# EAGLE board board (EAGLE 9.5.2)

Size 90 x 122 mm. Coordinates in mm from the lower left corner, seen from the top.
Outline: 0,0 90,0 90,122 0,122 0,0
Copper layers (1*16): Top 0.035mm / dielectric 1.5mm / Bottom 0.035mm
Design rules "default": minimum track width 6mil, minimum drill 0.35mm, track to track 6mil, track to pad 6mil, pad to pad 6mil, via to via 6mil, smd to smd 6mil, copper to edge 40mil, drill to drill 6mil, minimum pad ring 10mil, minimum via ring 8mil, stop-mask expansion 4mil, vias tented up to drill 0mil, thermal gap 10mil

## Footprints (pad centres in the part's own frame; a part is rotated, then mirrored left to right if it is on the bottom)
DIP1524W58P254L4191H406Q32N = drill 0.784 pad 1.184 square: 1 -7.62,19.05 | drill 0.784 pad 1.184: 2 -7.62,16.51; 3 -7.62,13.97; 4 -7.62,11.43; 5 -7.62,8.89; 6 -7.62,6.35; 7 -7.62,3.81; 8 -7.62,1.27; 9 -7.62,-1.27; 10 -7.62,-3.81; 11 -7.62,-6.35; 12 -7.62,-8.89; 13 -7.62,-11.43; 14 -7.62,-13.97; 15 -7.62,-16.51; 16 -7.62,-19.05; 17 7.62,-19.05; 18 7.62,-16.51; 19 7.62,-13.97; 20 7.62,-11.43; 21 7.62,-8.89; 22 7.62,-6.35; 23 7.62,-3.81; 24 7.62,-1.27; 25 7.62,1.27; 26 7.62,3.81; 27 7.62,6.35; 28 7.62,8.89; 29 7.62,11.43; 30 7.62,13.97; 31 7.62,16.51; 32 7.62,19.05
DIL20 = drill 0.813 long: 1 -11.43,-3.81; 2 -8.89,-3.81; 3 -6.35,-3.81; 4 -3.81,-3.81; 5 -1.27,-3.81; 6 1.27,-3.81; 7 3.81,-3.81; 8 6.35,-3.81; 9 8.89,-3.81; 10 11.43,-3.81; 11 11.43,3.81; 12 8.89,3.81; 13 6.35,3.81; 14 3.81,3.81; 15 1.27,3.81; 16 -1.27,3.81; 17 -3.81,3.81; 18 -6.35,3.81; 19 -8.89,3.81; 20 -11.43,3.81
DIP1556W56P254L3702H483Q28N = drill 0.759 pad 1.159 square: 1 -7.779,16.51 | drill 0.759 pad 1.159: 2 -7.779,13.97; 3 -7.779,11.43; 4 -7.779,8.89; 5 -7.779,6.35; 6 -7.779,3.81; 7 -7.779,1.27; 8 -7.779,-1.27; 9 -7.779,-3.81; 10 -7.779,-6.35; 11 -7.779,-8.89; 12 -7.779,-11.43; 13 -7.779,-13.97; 14 -7.779,-16.51; 15 7.779,-16.51; 16 7.779,-13.97; 17 7.779,-11.43; 18 7.779,-8.89; 19 7.779,-6.35; 20 7.779,-3.81; 21 7.779,-1.27; 22 7.779,1.27; 23 7.779,3.81; 24 7.779,6.35; 25 7.779,8.89; 26 7.779,11.43; 27 7.779,13.97; 28 7.779,16.51
SOIC127P1030X265-20N = smd 1.95 x 0.65: 1 -4.725,5.715; 2 -4.725,4.445; 3 -4.725,3.175; 4 -4.725,1.905; 5 -4.725,0.635; 6 -4.725,-0.635; 7 -4.725,-1.905; 8 -4.725,-3.175; 9 -4.725,-4.445; 10 -4.725,-5.715; 11 4.725,-5.715; 12 4.725,-4.445; 13 4.725,-3.175; 14 4.725,-1.905; 15 4.725,-0.635; 16 4.725,0.635; 17 4.725,1.905; 18 4.725,3.175; 19 4.725,4.445; 20 4.725,5.715
DIL14 = drill 0.813 long: 1 -7.62,-3.81; 2 -5.08,-3.81; 3 -2.54,-3.81; 4 0,-3.81; 5 2.54,-3.81; 6 5.08,-3.81; 7 7.62,-3.81; 8 7.62,3.81; 9 5.08,3.81; 10 2.54,3.81; 11 0,3.81; 12 -2.54,3.81; 13 -5.08,3.81; 14 -7.62,3.81
DIL16 = drill 0.813 long: 1 -8.89,-3.81; 2 -6.35,-3.81; 3 -3.81,-3.81; 4 -1.27,-3.81; 5 1.27,-3.81; 6 3.81,-3.81; 7 6.35,-3.81; 8 8.89,-3.81; 9 8.89,3.81; 10 6.35,3.81; 11 3.81,3.81; 12 1.27,3.81; 13 -1.27,3.81; 14 -3.81,3.81; 15 -6.35,3.81; 16 -8.89,3.81
PAK100/2500-5-50 = drill 1 pad 1.422: 1 -30.48,-1.27; 2 -30.48,1.27; 3 -27.94,-1.27; 4 -27.94,1.27; 5 -25.4,-1.27; 6 -25.4,1.27; 7 -22.86,-1.27; 8 -22.86,1.27; 9 -20.32,-1.27; 10 -20.32,1.27; 11 -17.78,-1.27; 12 -17.78,1.27; 13 -15.24,-1.27; 14 -15.24,1.27; 15 -12.7,-1.27; 16 -12.7,1.27; 17 -10.16,-1.27; 18 -10.16,1.27; 19 -7.62,-1.27; 20 -7.62,1.27; 21 -5.08,-1.27; 22 -5.08,1.27; 23 -2.54,-1.27; 24 -2.54,1.27; 25 0,-1.27; 26 0,1.27; 27 2.54,-1.27; 28 2.54,1.27; 29 5.08,-1.27; 30 5.08,1.27; 31 7.62,-1.27; 32 7.62,1.27; 33 10.16,-1.27; 34 10.16,1.27; 35 12.7,-1.27; 36 12.7,1.27; 37 15.24,-1.27; 38 15.24,1.27; 39 17.78,-1.27; 40 17.78,1.27; 41 20.32,-1.27; 42 20.32,1.27; 43 22.86,-1.27; 44 22.86,1.27; 45 25.4,-1.27; 46 25.4,1.27; 47 27.94,-1.27; 48 27.94,1.27; 49 30.48,-1.27; 50 30.48,1.27

## Placement (x,y rotation side)
IC1  AS6C4008-55PCN  [DIP1524W58P254L4191H406Q32N]  27.59,58.59 270 top
IC2  AS6C4008-55PCN  [DIP1524W58P254L4191H406Q32N]  27.59,38.37 270 top
IC3  74S299N  [DIL20]  70.67,9.02 180 top
IC4  74S299N  [DIL20]  70.61,21.02 180 top
IC5  AT28C64B-15PU  [DIP1556W56P254L3702H483Q28N]  28.05,100.15 270 top
IC6  AT28C64B-15PU  [DIP1556W56P254L3702H483Q28N]  28.05,79.68 270 top
IC7  74S299N  [DIL20]  18,21 180 top
IC8  SN74CBT3345DW  [SOIC127P1030X265-20N]  61,35 270 bottom
IC9  SN74CBT3345DW  [SOIC127P1030X265-20N]  61,35 90 top
IC10  SN74CBT3345DW  [SOIC127P1030X265-20N]  61,52 270 bottom
IC11  SN74CBT3345DW  [SOIC127P1030X265-20N]  61,52 90 top
IC12  SN74CBT3345DW  [SOIC127P1030X265-20N]  61,69 270 bottom
IC13  SN74CBT3345DW  [SOIC127P1030X265-20N]  61,69 90 top
IC14  SN74CBT3345DW  [SOIC127P1030X265-20N]  61,86 270 bottom
IC15  SN74CBT3345DW  [SOIC127P1030X265-20N]  61,86 90 top
IC16  SN74CBT3345DW  [SOIC127P1030X265-20N]  61,103 270 bottom
IC17  SN74CBT3345DW  [SOIC127P1030X265-20N]  61,103 90 top
IC18  74S299N  [DIL20]  18,9 180 top
IC19  7404N  [DIL14]  44,9 180 top
IC20  74S08N  [DIL14]  44,21 180 top
IC23  SN74CBT3345DW  [SOIC127P1030X265-20N]  78.72,103.37 90 top
V1  74238N  [DIL16]  80.41,77.07 270 top
V2  74238N  [DIL16]  80.41,43.93 270 top
X1  2550-5  [PAK100/2500-5-50]  45,116 0 top

## Library data of the parts
IC1 IC2 = SamacSys_Parts; DESCRIPTION: CMOS SRAM; HEIGHT: 4.064mm; MANUFACTURER_NAME: Alliance Memory; MANUFACTURER_PART_NUMBER: AS6C4008-55PCN; RS_PART_NUMBER: 7444561P; RS_PRICE-STOCK: http://uk.rs-online.com/web/p/products/7444561P
IC3 IC4 IC7 IC18-IC20 = 74xx-eu
IC5 IC6 = SamacSys_Parts; DESCRIPTION: AT28C64B-15PU, Parallel EEPROM Memory 64kbit, Parallel, 150ns 4.5 5.5 V, 28-Pin PDIP; HEIGHT: 4.826mm; MANUFACTURER_NAME: Microchip; MANUFACTURER_PART_NUMBER: AT28C64B-15PU; MOUSER_PART_NUMBER: 556-AT28C64B15PU; MOUSER_PRICE-STOCK: https://www.mouser.com/Search/Refine.aspx?Keyword=556-AT28C64B15PU
IC8-IC17 IC23 = SamacSys_Parts; DESCRIPTION: Texas Instruments SN74CBT3345DW, Bus Switch, 8 x 1:1, 4.5 5.5 V, 20-Pin SOIC; HEIGHT: 2.65mm; MANUFACTURER_NAME: Texas Instruments; MANUFACTURER_PART_NUMBER: SN74CBT3345DW
V1 V2 = 74ttl-din
X1 = con-3m; OC_FARNELL: 1788696; OC_NEWARK: unknown

## Nets
B_HI_TO_HI: IC15.1 V2.7
B_HI_TO_LO: IC14.1 V1.7
B_LO_TO_HI: IC13.1 V2.9
B_LO_TO_LO: IC12.1 V1.9
BITMODE_HI_BIT0: V2.1 X1.14
BITMODE_HI_BIT1: V2.2 X1.16
BITMODE_HI_BIT2: V2.3 X1.18
BITMODE_LO_BIT0: V1.1 X1.13
BITMODE_LO_BIT1: V1.2 X1.15
BITMODE_LO_BIT2: V1.3 X1.17
BUSA_BIT0: IC1.12 IC2.12 IC5.10 IC6.10 X1.19
BUSA_BIT1: IC1.11 IC2.11 IC5.9 IC6.9 X1.20
BUSA_BIT2: IC1.10 IC2.10 IC5.8 IC6.8 X1.21
BUSA_BIT3: IC1.9 IC2.9 IC5.7 IC6.7 X1.22
BUSA_BIT4: IC1.8 IC2.8 IC5.6 IC6.6 X1.23
BUSA_BIT5: IC1.7 IC2.7 IC5.5 IC6.5 X1.24
BUSA_BIT6: IC1.6 IC2.6 IC5.4 IC6.4 X1.25
BUSA_BIT7: IC1.5 IC2.5 IC5.3 IC6.3 X1.26
BUSA_BIT8: IC1.27 IC2.27 IC5.25 IC6.25 X1.27
BUSA_BIT9: IC1.26 IC2.26 IC5.24 IC6.24 X1.28
BUSA_BIT10: IC1.23 IC2.23 IC5.21 IC6.21 X1.29
BUSA_BIT11: IC1.25 IC2.25 IC5.23 IC6.23 X1.30
BUSA_BIT12: IC1.4 IC2.4 IC5.2 IC6.2 X1.31
BUSA_BIT13: IC1.28 IC2.28 X1.32
BUSA_BIT14: IC1.3 IC2.3 X1.33
BUSA_BIT15: IC5.20 IC6.20 IC19.1 X1.34
BUSB_BIT0: IC12.18 IC13.18 IC23.2 X1.35
BUSB_BIT1: IC12.17 IC13.17 IC23.3 X1.36
BUSB_BIT2: IC12.16 IC13.16 IC23.4 X1.37
BUSB_BIT3: IC12.15 IC13.15 IC23.5 X1.38
BUSB_BIT4: IC12.14 IC13.14 IC23.6 X1.39
BUSB_BIT5: IC12.13 IC13.13 IC23.7 X1.40
BUSB_BIT6: IC12.12 IC13.12 IC23.8 X1.41
BUSB_BIT7: IC12.11 IC13.11 IC23.9 X1.42
BUSB_BIT8: IC14.18 IC15.18 X1.43
BUSB_BIT9: IC14.17 IC15.17 X1.44
BUSB_BIT10: IC14.16 IC15.16 X1.45
BUSB_BIT11: IC14.15 IC15.15 X1.46
BUSB_BIT12: IC14.14 IC15.14 X1.47
BUSB_BIT13: IC14.13 IC15.13 X1.48
BUSB_BIT14: IC14.12 IC15.12 X1.49
BUSB_BIT15: IC14.11 IC15.11 X1.50
BUSF_BIT0: IC3.7 IC8.2 IC10.2 IC12.2 IC14.2 IC16.2
BUSF_BIT1: IC3.13 IC8.3 IC10.3 IC12.3 IC14.3 IC16.3
BUSF_BIT2: IC3.6 IC8.4 IC10.4 IC12.4 IC14.4 IC16.4
BUSF_BIT3: IC3.14 IC8.5 IC10.5 IC12.5 IC14.5 IC16.5
BUSF_BIT4: IC3.5 IC8.6 IC10.6 IC12.6 IC14.6 IC16.6
BUSF_BIT5: IC3.15 IC8.7 IC10.7 IC12.7 IC14.7 IC16.7
BUSF_BIT6: IC3.4 IC8.8 IC10.8 IC12.8 IC14.8 IC16.8
BUSF_BIT7: IC3.16 IC8.9 IC10.9 IC12.9 IC14.9 IC16.9
BUSF_BIT8: IC4.7 IC9.2 IC11.2 IC13.2 IC15.2 IC17.2
BUSF_BIT9: IC4.13 IC9.3 IC11.3 IC13.3 IC15.3 IC17.3
BUSF_BIT10: IC4.6 IC9.4 IC11.4 IC13.4 IC15.4 IC17.4
BUSF_BIT11: IC4.14 IC9.5 IC11.5 IC13.5 IC15.5 IC17.5
BUSF_BIT12: IC4.5 IC9.6 IC11.6 IC13.6 IC15.6 IC17.6
BUSF_BIT13: IC4.15 IC9.7 IC11.7 IC13.7 IC15.7 IC17.7
BUSF_BIT14: IC4.4 IC9.8 IC11.8 IC13.8 IC15.8 IC17.8
BUSF_BIT15: IC4.16 IC9.9 IC11.9 IC13.9 IC15.9 IC17.9
BUSM_BIT0: IC1.13 IC5.11 IC6.11 IC8.18 IC9.18
BUSM_BIT1: IC1.14 IC5.12 IC6.12 IC8.17 IC9.17
BUSM_BIT2: IC1.15 IC5.13 IC6.13 IC8.16 IC9.16
BUSM_BIT3: IC1.17 IC5.15 IC6.15 IC8.15 IC9.15
BUSM_BIT4: IC1.18 IC5.16 IC6.16 IC8.14 IC9.14
BUSM_BIT5: IC1.19 IC5.17 IC6.17 IC8.13 IC9.13
BUSM_BIT6: IC1.20 IC5.18 IC6.18 IC8.12 IC9.12
BUSM_BIT7: IC1.21 IC5.19 IC6.19 IC8.11 IC9.11
BUSM_BIT8: IC2.13 IC10.18 IC11.18
BUSM_BIT9: IC2.14 IC10.17 IC11.17
BUSM_BIT10: IC2.15 IC10.16 IC11.16
BUSM_BIT11: IC2.17 IC10.15 IC11.15
BUSM_BIT12: IC2.18 IC10.14 IC11.14
BUSM_BIT13: IC2.19 IC10.13 IC11.13
BUSM_BIT14: IC2.20 IC10.12 IC11.12
BUSM_BIT15: IC2.21 IC10.11 IC11.11
CLOCK: IC3.12 IC4.12 IC7.12 IC18.12 X1.5
FIDDLE_LOAD: IC3.1 IC3.19 IC4.1 IC4.19 X1.11
FIDDLE_N_OE: IC3.2 IC3.3 IC4.2 IC4.3 X1.12
GND: IC1.16 IC2.16 IC3.10 IC3.11 IC3.18 IC4.10 IC4.11 IC4.18 IC5.14 IC6.14 IC7.4 IC7.5 IC7.10 IC7.11 IC7.15 IC7.16 IC7.18 IC8.10 IC8.19 IC9.10 IC9.19 IC10.10 IC10.19 IC11.10 IC11.19 IC12.10 IC12.19 IC13.10 IC13.19 IC14.10 IC14.19 IC15.10 IC15.19 IC16.10 IC16.11 IC16.12 IC16.13 IC16.14 IC16.15 IC16.16 IC16.17 IC16.18 IC16.19 IC17.10 IC17.11 IC17.12 IC17.13 IC17.14 IC17.15 IC17.16 IC17.17 IC17.18 IC17.19 IC18.4 IC18.5 IC18.10 IC18.11 IC18.15 IC18.16 IC18.18 IC19.7 IC20.7 IC23.10 IC23.11 IC23.12 IC23.13 IC23.14 IC23.19 V1.4 V1.5 V1.8 V2.4 V2.5 V2.8 X1.3 X1.4
HI_BIT0: IC1.31 IC2.31 IC7.7 IC18.7 IC23.18
HI_BIT1: IC1.2 IC2.2 IC7.13 IC18.13 IC23.17
HI_BIT2: IC1.30 IC2.30 IC7.6 IC18.6 IC23.16
HI_BIT3: IC1.1 IC2.1 IC7.14 IC18.14 IC23.15
M_HI_TO_HI: IC11.1 V2.10
M_HI_TO_LO: IC10.1 V1.10
M_LO_TO_HI: IC9.1 V2.11
M_LO_TO_LO: IC8.1 V1.11
N$1: IC19.4 IC20.1 IC20.5
N$2: IC7.1 IC7.19 IC20.3
N$3: IC18.1 IC18.19 IC20.8
N$4: IC18.2 IC18.3 IC19.10
N$5: IC7.2 IC7.3 IC19.8
N$6: IC1.22 IC2.22 IC19.2
N$7: IC19.11 IC20.11
N$8: IC19.9 IC20.6
N$9: IC19.6 IC20.4 IC20.13
N_MAIN_OUT: IC1.24 IC2.24 IC5.22 IC6.22 X1.9
N_MAIN_STORE: IC1.29 IC2.29 X1.10
PREFIX_LOAD: IC19.5 IC20.2 IC20.10 IC23.1 X1.8
STARTUP: IC3.9 IC4.9 IC7.9 IC18.9 X1.6
USE_PREFIX_FAR: IC19.3 IC20.9 IC20.12 X1.7
VCC: IC1.32 IC2.32 IC3.20 IC4.20 IC5.27 IC5.28 IC6.27 IC6.28 IC7.20 IC8.20 IC9.20 IC10.20 IC11.20 IC12.20 IC13.20 IC14.20 IC15.20 IC16.20 IC17.20 IC18.20 IC19.14 IC20.14 IC23.20 V1.6 V1.16 V2.6 V2.16 X1.1 X1.2
ZERO_HI: IC17.1 V2.12
ZERO_LO: IC16.1 V1.12

## Tracks (layer width: path | path; a pad name or v marks a point on that pad's centre or on a via)
B_HI_TO_HI  (1 unrouted)
B_HI_TO_LO  (1 unrouted)
B_LO_TO_HI  (1 unrouted)
B_LO_TO_LO  (1 unrouted)
BITMODE_HI_BIT0  (1 unrouted)
BITMODE_HI_BIT1  (1 unrouted)
BITMODE_HI_BIT2  (1 unrouted)
BITMODE_LO_BIT0  (1 unrouted)
BITMODE_LO_BIT1  (1 unrouted)
BITMODE_LO_BIT2  (1 unrouted)
BUSA_BIT0  (4 unrouted)
BUSA_BIT1  (4 unrouted)
BUSA_BIT2  (4 unrouted)
BUSA_BIT3  (4 unrouted)
BUSA_BIT4  (4 unrouted)
BUSA_BIT5  (4 unrouted)
BUSA_BIT6  (4 unrouted)
BUSA_BIT7  (4 unrouted)
BUSA_BIT8  (4 unrouted)
BUSA_BIT9  (4 unrouted)
BUSA_BIT10  (4 unrouted)
BUSA_BIT11  (4 unrouted)
BUSA_BIT12  (4 unrouted)
BUSA_BIT13  (2 unrouted)
BUSA_BIT14  (2 unrouted)
BUSA_BIT15  (3 unrouted)
BUSB_BIT0  (3 unrouted)
BUSB_BIT1  (3 unrouted)
BUSB_BIT2  (3 unrouted)
BUSB_BIT3  (3 unrouted)
BUSB_BIT4  (3 unrouted)
BUSB_BIT5  (3 unrouted)
BUSB_BIT6  (3 unrouted)
BUSB_BIT7  (3 unrouted)
BUSB_BIT8  (2 unrouted)
BUSB_BIT9  (2 unrouted)
BUSB_BIT10  (2 unrouted)
BUSB_BIT11  (2 unrouted)
BUSB_BIT12  (2 unrouted)
BUSB_BIT13  (2 unrouted)
BUSB_BIT14  (2 unrouted)
BUSB_BIT15  (2 unrouted)
BUSF_BIT0  (5 unrouted)
BUSF_BIT1  (5 unrouted)
BUSF_BIT2  (5 unrouted)
BUSF_BIT3  (5 unrouted)
BUSF_BIT4  (5 unrouted)
BUSF_BIT5  (5 unrouted)
BUSF_BIT6  (5 unrouted)
BUSF_BIT7  (5 unrouted)
BUSF_BIT8  (5 unrouted)
BUSF_BIT9  (5 unrouted)
BUSF_BIT10  (5 unrouted)
BUSF_BIT11  (5 unrouted)
BUSF_BIT12  (5 unrouted)
BUSF_BIT13  (5 unrouted)
BUSF_BIT14  (5 unrouted)
BUSF_BIT15  (5 unrouted)
BUSM_BIT0  (4 unrouted)
BUSM_BIT1  (4 unrouted)
BUSM_BIT2  (4 unrouted)
BUSM_BIT3  (4 unrouted)
BUSM_BIT4  (4 unrouted)
BUSM_BIT5  (4 unrouted)
BUSM_BIT6  (4 unrouted)
BUSM_BIT7  (4 unrouted)
BUSM_BIT8  (2 unrouted)
BUSM_BIT9  (2 unrouted)
BUSM_BIT10  (2 unrouted)
BUSM_BIT11  (2 unrouted)
BUSM_BIT12  (2 unrouted)
BUSM_BIT13  (2 unrouted)
BUSM_BIT14  (2 unrouted)
BUSM_BIT15  (2 unrouted)
CLOCK  (4 unrouted)
FIDDLE_LOAD  (4 unrouted)
FIDDLE_N_OE  (4 unrouted)
GND  (75 unrouted)
HI_BIT0  (4 unrouted)
HI_BIT1  (4 unrouted)
HI_BIT2  (4 unrouted)
HI_BIT3  (4 unrouted)
M_HI_TO_HI  (1 unrouted)
M_HI_TO_LO  (1 unrouted)
M_LO_TO_HI  (1 unrouted)
M_LO_TO_LO  (1 unrouted)
N$1  (2 unrouted)
N$2  (2 unrouted)
N$3  (2 unrouted)
N$4  (2 unrouted)
N$5  (2 unrouted)
N$6  (2 unrouted)
N$7  (1 unrouted)
N$8  (1 unrouted)
N$9  (2 unrouted)
N_MAIN_OUT  (4 unrouted)
N_MAIN_STORE  (2 unrouted)
PREFIX_LOAD  (4 unrouted)
STARTUP  (4 unrouted)
USE_PREFIX_FAR  (3 unrouted)
VCC  (28 unrouted)
ZERO_HI  (1 unrouted)
ZERO_LO  (1 unrouted)